# Altium PCB NanoEEG_v3.PcbDoc (part 2 of 2)
Units mm, origin at the board's own origin, x right, y up, seen from the top; angles counter-clockwise.
Board outline 66 x 52 mm, 4 copper layers (Top Layer, Gound Plane 1, Power Plane 1, Bottom Layer), stack 1.87 mm thick; 84 components, 86 nets, 411 pads, 232 vias.
Unrouted connection lines stored in the file: 20.
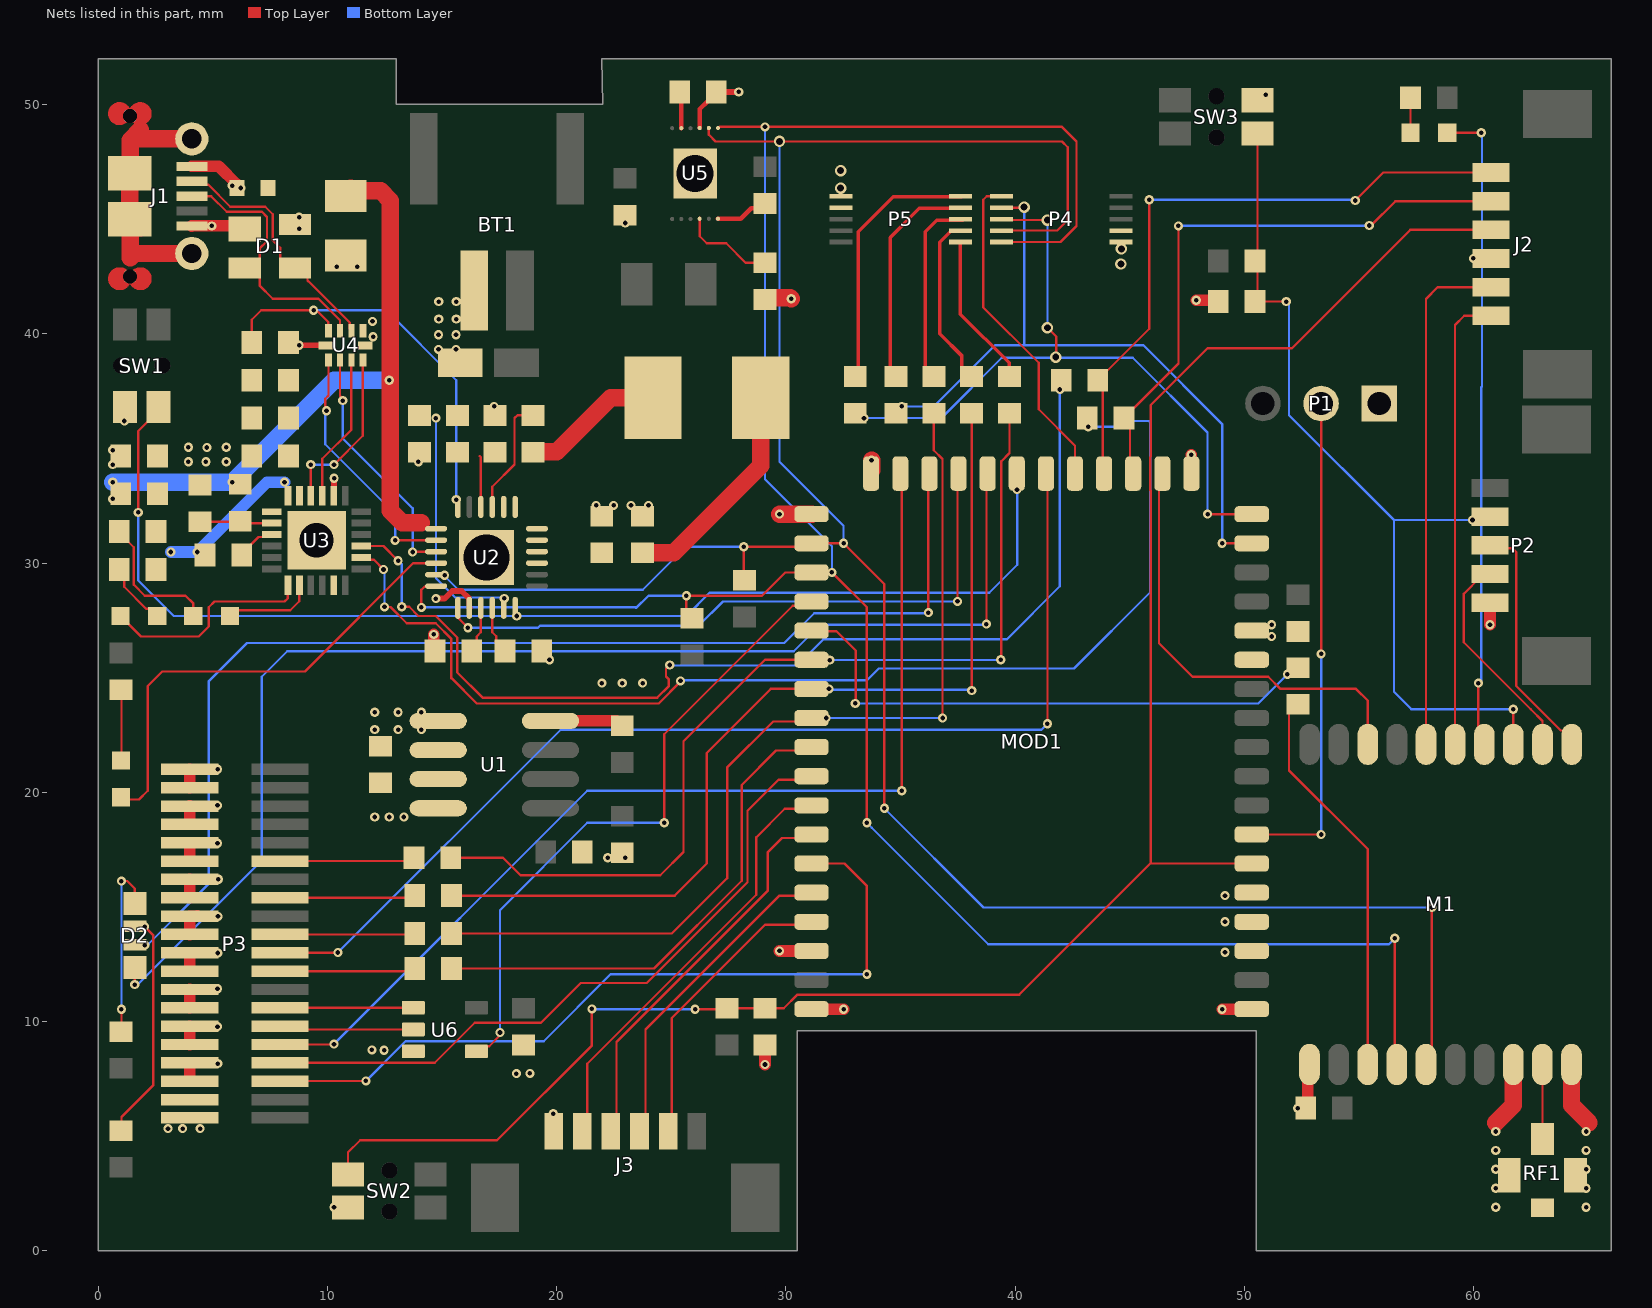
[diagram p4: the nets of this part, all layers, seen from the top]

## Via types
v1: diameter 0.4, hole 0.2, Top Layer to Bottom Layer, 215 vias
v2: diameter 0.5, hole 0.3, Top Layer to Bottom Layer, 11 vias
v3: diameter 4, hole 2, Top Layer to Bottom Layer, 3 vias
v4: diameter 2, hole 1.5, Top Layer to Bottom Layer, 1 vias
v5: diameter 1.2, hole 0.9, Top Layer to Bottom Layer, 1 vias
v6: diameter 1.5, hole 1.3, Top Layer to Bottom Layer, 1 vias

## Nets (pads, with @x,y where several pads share a name; then routed paths per layer and width w, separated by ;. In a path a pad name is that pad's centre, name@x,y a point inside that pad or via, vN(x,y) a via of type N, cw(c..) or ccw(c..) an arc to the next point about the centre after c; other vN are vias at no path point) (continued)
BQ_CHARGE_STAT: LED4.1 U2.4 | length 20.7
  Top Layer w0.1: LED4.1@1,19.79 1.105,19.685 1.778,19.685 2.159,20.066 2.159,24.638 2.794,25.273 9.017,25.273 13.74,29.996 U2.4@14.74,29.996
BQ_D+: U2.2 U4.1 | length 11
  Top Layer w0.1: v1(9.959,36.643) 9.907,36.695 9.907,37.166 10.045,37.304 U4.1@10.045,38.86 ; v1(12.954,30.988) 14.732,30.988 U2.2@14.74,30.996
  Bottom Layer w0.1: v1(9.959,36.643) 9.906,36.591 9.906,35.179 12.954,32.131 v1(12.954,30.988)
BQ_D-: U2.3 U4.2 | length 10.7
  Top Layer w0.1: U4.2@10.545,38.86 10.545,37.288 10.668,37.165 v1(10.668,37.084) ; v1(13.716,30.48) 13.724,30.488 14.732,30.488 U2.3@14.74,30.496
  Bottom Layer w0.1: v1(10.668,37.084) 10.668,35.433 13.716,32.385 v1(13.716,30.48)
BQ_DSEL: R14.2 U2.24 U4.9 | length 17.8
  Top Layer w0.1: R14.2@6.701,39.624 6.701,40.61 7.112,41.021 9.525,41.021 10.033,40.513 10.033,40.147 U4.9@10.045,40.134
  Bottom Layer w0.1: v1(9.398,41.021) 12.573,41.021 15.621,37.973 v1(15.621,32.766)
BQ_INT: MOD1.27 U2.7 | length 28.3
  Top Layer w0.102: U2.7@15.69,28.046 15.69,27.646 15.748,27.588 15.748,27.559 v1(16.129,27.178) ; v1(37.48,28.324) 37.48,33.734 MOD1.27@37.525,33.779
  Bottom Layer w0.102: v1(16.129,27.178) 16.132,27.181 19.184,27.181 19.268,27.266 26.189,27.266 27.248,28.324 v1(37.48,28.324)
BQ_nCE: R18.1 U2.9 | length 2
  Top Layer w0.102: R18.1@16.294,26.162 16.51,26.378 16.51,26.797 16.69,26.977 U2.9@16.69,28.046
BQ_nQON: MOD1.25 SW1.1' U2.12 | length 51
  Top Layer w0.102: v1(1.75,32.21) 1.75,35.753 2.63,36.633 SW1.1'@2.63,36.808
  Bottom Layer w0.102: v1(1.75,32.21) 1.75,29.238 3.299,27.689 v1@18.253,27.689 ; v1(18.254,27.69) 25.658,27.69 26.67,28.702 38.862,28.702 40.087,29.927 v1@40.087,33.092
  other v1: 40.075,33.201
BQ_REGN: C12.1 R15.1 U2.22 | length 2.2
  Top Layer w0.1: 16.637,34.671 16.69,34.618 U2.22@16.69,32.446
CC1310_nRESET: C21.2 M1.3 P2.4 R24.1 SW3.1 | length 37.8
  Top Layer w0.1: SW3.1@50.568,48.353 50.568,43.18 50.568,41.513 C21.2@50.457,41.402 50.584,41.402 v1(51.816,41.402) ; v1(61.722,23.622) 61.722,22.092 M1.3@61.726,22.088
  Bottom Layer w0.1: v1@51.943,41.402 51.943,36.449 56.515,31.877 ; v1(59.944,31.877) 56.515,31.877 ; v1(61.722,23.622) 57.277,23.622 56.515,24.384 56.515,31.877
CC1310_Sync_PWM: MOD1.35 R34.2 | length 24
  Top Layer w0.1: MOD1.35@31.115,27.051 31.147,27.019 32.204,27.019 33.04,26.183 33.04,23.896 v1(33.02,23.876)
  Bottom Layer w0.1: v1(33.02,23.876) 50.594,23.876 v1(51.869,25.151)
CC1310_TCKC: M1.2 P2.2 | length 9.4
  Top Layer w0.1: P2.2@60.706,29.397 60.306,29.397 59.563,28.654 59.563,26.543 62.484,23.622 62.996,23.11 M1.2@62.996,22.088
CC1310_TMSC: M1.1 P2.3 | length 10.7
  Top Layer w0.1: P2.3@60.706,30.647 61.682,30.647 61.849,30.48 61.849,24.638 62.611,23.876 63.796,22.691 63.901,22.691 64.27,22.322 M1.1@64.27,22.088
CC1310_UART_RX: J2.1 M1.5 | length 20
  Top Layer w0.1: M1.5@59.186,22.088 59.182,22.092 59.182,40.386 59.579,40.783 J2.1@60.746,40.783
CC1310_UART_TX: J2.2 M1.6 | length 22.5
  Top Layer w0.1: M1.6@57.916,22.088 57.912,22.092 57.912,41.519 58.426,42.033 J2.2@60.746,42.033
CC1310_WAKEUP: M1.8 MOD1.20 | length 19.3
  Top Layer w0.1: MOD1.20@46.273,33.75 46.273,26.498 47.733,25.038 51.036,25.038 51.563,24.511 54.864,24.511 55.372,24.003 55.372,22.092 M1.8@55.376,22.088
CC3235_JTAG_TCK: J3.4 MOD1.44 | length 14
  Top Layer w0.1: J3.4@23.876,5.177 23.876,9.652 29.718,15.494 MOD1.44@30.949,15.494
CC3235_JTAG_TDI: J3.2 MOD1.41 | length 18.7
  Top Layer w0.1: J3.2@21.336,5.123 21.336,8.163 28.702,15.529 28.702,18.034 29.948,19.28 MOD1.41@30.973,19.28
CC3235_JTAG_TDO: J3.3 MOD1.42 | length 16.9
  Top Layer w0.1: J3.3@22.606,5.211 22.606,9.112 29.21,15.716 29.21,17.399 29.821,18.01 MOD1.42@30.973,18.01
CC3235_JTAG_TMS: J3.5 MOD1.45 | length 12.6
  Top Layer w0.1: J3.5@25.019,5.15 25.019,10.16 29.083,14.224 MOD1.45@30.949,14.224
CC3235_MODE02: MOD1.7 P1.2 | length 22
  Top Layer w0.1: MOD1.7@50.315,18.161 50.491,18.337 50.668,18.161 v1(53.34,18.161) ; v1(53.34,26.035) P1.2@53.34,36.957
  Bottom Layer w0.1: v1(53.34,18.161) v1(53.34,26.035)
CC3235_nRST: C20.2 J2.4 MOD1.6 R20.1 SW2.1 | length 84.6
  Top Layer w0.1: SW2.1@10.9,3.336 10.9,4.296 11.43,4.826 17.399,4.826 21.534,8.961 v1(21.534,10.555) ; v1(26.035,10.541) 27.394,10.541 R20.1@27.432,10.579 C20.2@29.083,10.579 29.905,10.579 30.502,11.176 40.173,11.176 45.908,16.912 ; MOD1.6@50.315,16.891 45.929,16.891 45.908,16.912 ; J2.4@60.746,44.533 57.233,44.533 52.07,39.37 48.387,39.37 45.908,36.891 45.908,34.642 45.888,34.622 45.888,33.18 45.908,33.16 45.908,16.912
  Bottom Layer w0.1: v1(21.534,10.555) 21.549,10.541 v1(26.035,10.541)
CC3235_UART_RX: J2.6 MOD1.22 R23.1 | length 28.3
  Top Layer w0.1: R23.1@43.599,37.973 45.847,40.221 v1(45.847,45.847) ; R23.1@43.815,37.973 43.815,33.961 MOD1.22@43.875,33.901 ; v1@54.733,45.847 54.768,45.812 v1(54.829,45.812) 56.05,47.033 J2.6@60.746,47.033
  Bottom Layer w0.1: v1(45.847,45.847) v1@54.733,45.847
CC3235_UART_TX: J2.5 MOD1.21 R22.1 | length 25.6
  Top Layer w0.1: R22.1@44.361,36.322 R22.1@44.577,36.538 ; R22.1@44.958,36.538 47.117,38.697 v1(47.117,44.704) ; MOD1.21@45.003,34.155 R22.1@45.003,36.322 ; v1(55.438,44.723) 55.518,44.723 56.578,45.783 J2.5@60.746,45.783
  Bottom Layer w0.1: v1(47.117,44.704) 55.419,44.704 v1(55.438,44.723)
CoP_LED1: LED3.1 M1.4 | length 28.4
  Top Layer w0.1: LED3.1@58.839,48.768 v1(60.325,48.768) ; v1(60.198,24.765) 60.198,22.346 M1.4@60.456,22.088
  Bottom Layer w0.1: v1(60.198,24.765) 60.325,24.892 60.325,37.672 60.356,37.702 60.356,48.26 60.356,48.737 v1(60.325,48.768)
CP2102_RXD: R22.2 U3.20 | length 51.3
  Top Layer w0.1: U3.20@11.475,30.238 11.575,30.138 12.026,30.138 v1(12.446,29.718) ; v1(12.489,28.086) 12.748,28.086 13.461,27.372 14.724,27.372 15.406,26.69 15.406,24.98 16.51,23.876 24.447,23.876 25.4,24.829 v1(25.4,24.86)
  Bottom Layer w0.1: v1(12.446,29.718) 12.489,29.675 v1(12.489,28.086) ; v1(25.4,24.86) 25.428,24.888 33.531,24.888 34.043,25.4 42.559,25.4 45.889,28.73 45.889,36.134 45.83,36.192 44.65,36.192 44.398,35.941 v1(43.18,35.941)
CP2102_RXT: LED1.1 U3.13 | length 9.4
  Top Layer w0.1: LED1.1@0.978,27.686 1.328,27.336 1.867,26.797 4.386,26.797 4.826,27.237 4.826,28.067 5.08,28.321 8.128,28.321 8.275,28.468 U3.13@8.275,29.038
CP2102_SUSPEND: U3.17
CP2102_TXD: R23.2 U3.21 | length 46.4
  Top Layer w0.1: U3.21@11.475,30.738 12.442,30.738 v1(13.081,30.099) ; v1(13.239,28.092) 13.564,28.092 13.966,27.69 14.728,27.69 15.667,26.751 15.667,25.227 16.764,24.13 24.38,24.13 24.892,24.642 24.892,24.919 24.766,25.045 24.766,25.404 24.913,25.551 v1(24.93,25.551)
  Bottom Layer w0.1: v1(13.081,30.099) 13.239,29.941 v1(13.239,28.092) ; v1(24.93,25.551) 24.954,25.527 30.48,25.527 31.623,26.67 39.624,26.67 41.944,28.99 v1(41.944,37.568)
CP2102_TXT: LED2.1 U3.14 | length 4
  Top Layer w0.102: LED2.1@5.753,27.686 6.007,27.94 8.382,27.94 8.775,28.333 U3.14@8.775,29.038
CP2102_VDD: C13.2 C16.2 C17.2 R3.2 R4.2 R12.2 R14.1 U3.5 U3.6 U4.10 | length 7.9
  Top Layer w0.254: R14.1@8.428,39.497 U4.10@9.935,39.497
  Top Layer w0.508: R14.1@8.301,39.624 R14.1@8.428,39.497
  Bottom Layer w0.508: v1(3.175,30.48) v1(4.318,30.48) 7.366,33.528 v1(8.128,33.528)
  other v1: 8.763,39.497
CP_D+: U3.3 U4.3 | length 6.4
  Top Layer w0.1: U3.3@9.775,32.938 9.779,32.942 9.779,34.544 11.045,35.81 U4.3@11.045,38.86
CP_D-: U3.4 U4.4 | length 7.5
  Top Layer w0.1: v1(9.271,34.29) 9.271,33.061 9.335,32.998 U3.4@9.275,32.938 ; v1(10.287,34.29) 11.545,35.548 U4.4@11.545,38.86
  Bottom Layer w0.1: v1(9.271,34.29) v1(10.287,34.29)
D+: D1.2 J1.3 U4.8 | length 11.9
  Top Layer w0.1: J1.3@4.085,46 4.927,46 5.611,45.316 7.142,45.316 7.366,45.092 7.366,44.038 7.043,43.715 7.043,43.265 D1.2@6.643,42.865 ; D1.2@6.393,42.865 D1.2@6.643,42.865 ; U4.8@10.545,40.134 10.545,40.592 9.608,41.529 7.62,41.529 7.043,42.106 7.043,42.465 D1.2@6.643,42.865
D-: D1.3 J1.2 U4.7 | length 10.9
  Top Layer w0.1: J1.2@4.085,46.65 4.235,46.5 4.808,46.5 5.765,45.543 7.289,45.543 7.62,45.212 7.62,44.069 7.943,43.746 7.943,43.265 8.343,42.865 8.734,42.865 9.134,42.465 9.134,42.324 9.258,42.2 10.972,40.486 10.972,40.208 U4.7@11.045,40.134
GND: BT1.2 C1.1 C2.2 C3.1 C4.1 C6.1 C7.1 C8.1 C9.1 C10.1 C11.1 C12.2 C13.1 C14.2 C15.1 C16.1 C17.1 C18.1 C19.1 C20.1 C21.1 D1.1 J1.5 J1.6 J1.7 J1.8 J1.9 J1.10 J1.11 J2.3 J3.1 M1.11 M1.18 M1.20 MOD1.1 MOD1.3 MOD1.4 MOD1.5 MOD1.13 MOD1.14 MOD1.19 MOD1.30 MOD1.31 MOD1.46 MOD1.48 P1.1 P2.1 P3.5 P3.7 P3.9 P3.11 P3.13 P3.15 P3.17 P3.19 P3.21 P3.23 P3.25 P3.27 P3.29 P3.31 P3.33 P3.35 P3.37 P3.39 P4.4 P4.5 P5.4 P5.5 R10.1 R13.2 R17.2 R18.2 R21.2 RF1.2 RF1.3 RF1.4 SW1.2' SW2.2 SW3.2 U1.1 U1.2 U2.8 U2.17 U2.18 U2.25 U3.2 U3.25 U4.5 U4.6 U5.3 U5.13 U6.3 | length 46.6
  Top Layer w0.2: U5.3@26.235,48.975 26.235,49.801 26.58,50.146 26.612,50.146 C15.1@26.962,50.496
  Top Layer w0.254: U3.2@10.275,32.938 10.282,32.945 10.282,33.687 v1(10.289,33.694) ; v1(14.732,28.448) 15.113,28.448 15.448,28.783 15.852,28.783 16.183,28.451 16.183,28.053 U2.8@16.19,28.046 ; C15.1@26.962,50.496 27.012,50.546 v1(27.94,50.546)
  Top Layer w0.508: P3.5@4,7.4 P3.7@4,8.2 ; P3.9@4,9 P3.11@4,9.8 ; P3.13@4,10.6 P3.15@4,11.4 ; P3.17@4,12.2 P3.19@4,13 ; P3.21@4,13.8 P3.23@4,14.6 4.314,14.6 P3.23@4.318,14.604 ; P3.25@4,15.4 P3.27@4,16.2 ; P3.29@4,17 P3.31@4,17.8 ; P3.33@4,18.6 P3.35@4,19.4 ; P3.37@4,20.2 P3.39@4,21 ; J1.5@4.085,44.7 4.089,44.704 v1(4.953,44.704) 6.254,44.704 D1.1@6.393,44.565 ; v1(14.639,26.885) 14.639,26.217 R18.2@14.694,26.162 ; R10.1@19.342,26.162 19.304,26.162 R10.1@19.431,26.289 ; v1(29.083,8.128) C20.1@29.083,8.979 C20.1@29.121,9.017 ; v1(29.718,13.081) MOD1.46@31.115,13.081 ; MOD1.48@31.115,10.541 v1(32.512,10.541) ; v1(47.675,34.72) 47.675,33.911 MOD1.19@47.685,33.901 ; v1(47.894,41.463) 48.796,41.463 C21.1@48.857,41.402 ; v1(49.022,10.541) MOD1.1@50.315,10.541 ; C6.1@52.667,6.223 52.757,6.313 52.757,8.053 M1.11@52.832,8.128 ; v1(60.706,27.305) P2.1@60.706,28.274
  Top Layer w0.762: J1.9@1.385,47 J1.9@1.397,47.012 ; J1.10@1.458,45 J1.10@1.827,44.631 ; 1.843,48.5 J1.6@4.085,48.5 J1.6@3.953,48.632 ; 1.843,48.895 1.397,48.449 J1.9@1.397,47.012 ; J1.7@4.085,43.5 1.59,43.5 1.397,43.307 1.397,44.988 J1.10@1.385,45 1.385,46.988 1.397,47 J1.9@1.397,47.012 ; R21.2@29.083,41.491 29.152,41.56 30.195,41.56 v1(30.226,41.529) ; v1(29.718,32.131) MOD1.31@31.115,32.131 ; MOD1.30@33.731,34.044 v1(33.731,34.484) ; 60.96,5.588 61.722,6.35 M1.18@61.722,8.128 ; M1.20@64.26,8.128 64.26,6.352 65.024,5.588
  other v1: 10.287,1.905 60.96,1.905 64.897,1.905 60.96,2.73 64.897,2.73 60.96,3.556 64.897,3.556 60.96,4.381 64.897,4.381 60.96,5.207 64.897,5.207 19.852,5.982 52.324,6.223 18.243,7.731 18.832,7.739 5.214,8.169 11.938,8.763 12.472,8.751 5.207,9.779 5.207,11.43 5.221,12.992 49.149,13.025 49.149,14.351 5.227,14.585 49.149,15.494 5.244,16.205 22.225,17.145 22.987,17.145 5.207,17.78 5.207,19.431 5.211,21.006 12.065,22.733 13.081,22.733 14.097,22.733 12.065,23.495 13.081,23.495 14.097,23.495 19.685,25.781 51.181,26.797 51.181,27.305 21.717,32.512 22.479,32.512 23.241,32.512 24.003,32.512 3.937,34.417 4.699,34.417 5.588,34.417 13.97,34.417 4.743,35.038 3.937,35.052 5.588,35.052 1.143,36.195 17.272,36.83 14.846,39.318 15.608,39.318 11.993,39.87 14.846,39.953 15.608,39.953 11.966,40.536 14.859,40.64 15.621,40.64 14.859,41.402 15.621,41.402 10.414,42.926 11.303,42.926 59.979,43.284 22.987,44.831 50.927,50.419
  other v2: 44.606,43.043 44.628,43.703 32.385,46.355 32.385,47.117
  other v4: 9.525,30.988
I2C_SCL_B: M1.15 MOD1.32 P4.9 R6.2 U2.5 U5.2 | length 106.3
  Top Layer w0.1: U2.5@14.74,29.496 14.759,29.515 14.81,29.464 v1(15.113,29.464) ; U5.2@26.635,48.975 26.635,48.684 26.931,48.388 v2(29.717,48.388) 29.718,48.387 42.037,48.387 42.291,48.133 42.291,44.958 41.833,44.5 P4.9@39.395,44.5 ; R6.2@28.194,29.248 28.067,29.375 28.155,29.463 v1(28.155,30.712) 30.966,30.712 MOD1.32@31.115,30.861 v1(32.512,30.861) 34.29,29.083 v1(34.29,19.304) ; MOD1.32@30.973,30.993 MOD1.32@31.1,31.12 ; M1.15@58.162,8.378 v1(58.162,14.976)
  Bottom Layer w0.1: v1(15.113,29.464) 15.113,29.423 15.703,28.833 23.753,28.833 25.632,30.712 v1(28.155,30.712) ; v2(29.717,48.388) 29.717,34.418 32.512,31.623 v1(32.512,30.861) ; v1@34.287,19.307 38.618,14.976 v1(58.162,14.976)
I2C_SDA_B: M1.14 MOD1.33 P4.10 R2.2 U2.6 U5.1 | length 107.4
  Top Layer w0.1: v1(14.097,28.067) 14.097,28.829 14.237,28.969 14.713,28.969 U2.6@14.74,28.996 ; R2.2@25.908,27.597 25.654,27.851 v1(25.654,28.575) 28.956,28.575 29.972,29.591 MOD1.33@31.115,29.591 v1(32.004,29.591) 33.528,28.067 v1(33.528,18.669) ; U5.1@27.035,48.975 27.057,48.975 27.103,49.022 v1(29.083,49.022) 42.037,49.022 42.672,48.387 42.672,44.704 41.968,44 P4.10@39.395,44 ; v1(56.553,13.635) 56.553,8.217 M1.14@56.642,8.128
  Bottom Layer w0.1: v1(14.097,28.067) 23.431,28.067 23.463,28.035 24.003,28.575 v1(25.654,28.575) ; v1(29.083,49.022) 29.083,33.655 32.004,30.734 v1(32.004,29.591) ; v1(33.528,18.669) 33.74,18.457 38.82,13.377 56.299,13.377 56.553,13.631 v1(56.553,13.635)
INT_1: MOD1.23 P4.6 | length 14.5
  Top Layer w0.1: P4.6@39.395,46 38.761,46 38.608,45.847 38.608,41.148 41.021,38.735 41.021,36.703 42.605,35.119 MOD1.23@42.605,33.901
INT_2: MOD1.17 P4.7 R32.2 | length 30.2
  Top Layer w0.1: P4.7@39.395,45.5 40.364,45.5 v2(40.386,45.522) ; v1(49.022,30.861) 49.807,30.861 50.061,31.115 MOD1.17@50.315,30.861
  Bottom Layer w0.1: v1(35.052,36.83) 36.449,36.83 39.116,39.497 45.593,39.497 49.022,36.068 v1(49.022,30.861) ; 40.386,39.497 v2(40.386,45.522)
INT_3: MOD1.18 P4.8 R33.2 | length 31.2
  Top Layer w0.1: P4.8@39.395,45 39.437,44.958 v2(41.402,44.958) ; v2(41.402,40.259) 41.783,39.878 v2@41.783,38.979 ; v1(48.387,32.131) 50.061,32.131 50.188,32.258 MOD1.18@50.315,32.131
  Bottom Layer w0.1: v1(33.401,36.322) 36.779,36.322 39.408,38.951 45.123,38.951 48.387,35.687 v1(48.387,32.131) ; v2(41.402,40.259) v2(41.402,44.958)
  other v2: 41.767,38.979
Mod1_nDRDY: P3.12 U6.2 | length 5.9
  Top Layer w0.1: P3.12@7.93,9.8 8.078,9.652 U6.2@13.746,9.652
Mod2_nCS: MOD1.24 P3.20 | length 48.6
  Top Layer w0.1: P3.20@7.93,13 10.441,13 v1(10.455,13.014) ; MOD1.24@41.335,33.901 41.417,33.819 41.402,33.804 v1(41.402,22.987)
  Bottom Layer w0.1: v1(10.455,13.014) 20.174,22.733 41.148,22.733 v1(41.402,22.987)
Mod2_nDRDY: P3.14 U6.1 | length 5.8
  Top Layer w0.1: P3.14@7.93,10.6 7.932,10.602 U6.1@13.746,10.602
Mod_MISO: P3.26 R26.2 | length 5.9
  Top Layer w0.1: P3.26@7.93,15.4 13.719,15.4 R26.2@13.813,15.494
Mod_MOSI: P3.22 R27.2 | length 5.9
  Top Layer w0.1: P3.22@7.93,13.8 13.77,13.8 R27.2@13.813,13.843
Mod_nCS: P3.18 R28.2 | length 5.9
  Top Layer w0.1: P3.18@7.93,12.2 13.694,12.2 R28.2@13.813,12.319
Mod_nDRDY: MOD1.34 U6.4 | length 28.2
  Top Layer w0.1: U6.4@16.496,8.702 16.721,8.927 17.054,8.927 17.526,9.399 v1(17.526,9.525) ; v1(24.689,18.673) 24.689,22.53 30.293,28.134 30.928,28.134 MOD1.34@31.115,28.321
  Bottom Layer w0.1: v1(17.526,9.525) 17.526,14.859 21.336,18.669 v1@24.638,18.669
Mod_nPWDN: MOD1.40 P3.8 | length 30
  Top Layer w0.1: P3.8@7.93,8.2 14.677,8.2 16.429,9.952 19.313,9.952 21.045,11.684 23.929,11.684 28.321,16.076 28.321,19.197 29.674,20.55 MOD1.40@30.973,20.55
Mod_nRESET: MOD1.43 P3.6 | length 34.2
  Top Layer w0.1: P3.6@7.93,7.4 7.941,7.411 v1(11.677,7.411) ; MOD1.43@31.115,16.891 32.551,16.891 33.528,15.914 v1(33.528,12.065)
  Bottom Layer w0.1: v1(11.677,7.411) 13.409,9.144 19.431,9.144 22.352,12.065 v1(33.528,12.065)
Mod_SCLK: P3.30 R25.2 | length 5.9
  Top Layer w0.1: P3.30@7.93,17 13.63,17 R25.2@13.775,17.145
Mod_START: MOD1.29 P3.10 | length 45.7
  Top Layer w0.1: P3.10@7.93,9 10.27,9 v1(10.287,9.017) ; MOD1.29@34.985,33.901 34.798,33.714 35.052,33.46 v1(35.052,20.066)
  Bottom Layer w0.1: v1(10.287,9.017) 21.336,20.066 v1(35.052,20.066)
NetC5_1: C5.1 U2.21 | length 5.1
  Top Layer w0.1: U2.21@17.19,32.446 17.19,33.323 18.161,34.294 18.161,36.322 18.288,36.449 18.954,36.449 C5.1@18.968,36.435
NetC5_2: C5.2 L1.1 U2.19 U2.20 | length 6.2
  Top Layer w0.762: C5.2@18.968,34.835 18.985,34.852 19.993,34.852 22.352,37.211 L1.1@24.201,37.211
NetC15_2: C15.2 U5.5 | length 1.6
  Top Layer w0.2: C15.2@25.362,50.546 25.435,50.473 U5.5@25.435,48.965
NetD2_2: D2.2 R8.2 | length 9.6
  Top Layer w0.1: R8.2@1,5.245 1.016,5.261 1.016,5.842 2.409,7.235 2.409,13.76 v1(2.025,14.144)
NetD2_4: D2.4 R7.2 | length 7.9
  Top Layer w0.1: R7.2@1,9.563 1.016,9.579 v1(1.016,10.541) ; v1(1.016,16.129) 1.27,16.129 1.6,15.799 D2.4@1.6,15.158
  Bottom Layer w0.1: v1(1.016,10.541) v1(1.016,16.129)
NetLED1_2: LED1.2 R3.1 | length 2.8
  Top Layer w0.1: R3.1@0.922,29.718 1.137,29.503 1.137,28.962 2.089,28.01 2.254,28.01 LED1.2@2.578,27.686
NetLED2_2: LED2.2 R4.1 | length 6.1
  Top Layer w0.1: R4.1@0.922,31.369 0.922,31.319 1.549,30.692 1.549,29.058 2.032,28.575 3.81,28.575 4.153,28.232 LED2.2@4.153,27.686
NetLED3_2: LED3.2 R5.1 | length 1.5
  Top Layer w0.1: LED3.2@57.239,48.768 R5.1@57.239,50.292
NetLED4_2: LED4.2 R9.1 | length 3.1
  Top Layer w0.1: LED4.2@1,21.39 1.016,21.406 1.016,24.457 R9.1@1,24.473
NetM1_13: M1.13 R34.1 | length 17.3
  Top Layer w0.1: R34.1@52.324,23.838 51.943,23.457 51.943,20.955 55.372,17.526 M1.13@55.372,8.128
NetM1_19: M1.19 RF1.1 | length 3.3
  Top Layer w0.1: RF1.1@62.992,4.877 M1.19@62.992,8.128
NetMOD1_36: MOD1.36 R25.1 R29.2 | length 41.2
  Top Layer w0.1: R25.1@15.375,17.145 17.657,17.145 18.419,16.383 24.511,16.383 25.527,17.399 25.527,22.225 29.083,25.781 MOD1.36@31.115,25.781 ; v1@39.386,25.781 39.386,34.434 39.751,34.799 R29.2@39.751,36.538
  Bottom Layer w0.1: v1(31.907,25.768) 39.357,25.768 v1(39.37,25.781)
NetMOD1_37: MOD1.37 R26.1 R30.2 | length 40.6
  Top Layer w0.1: R26.1@15.413,15.494 25.146,15.494 26.543,16.891 26.543,21.717 29.337,24.511 MOD1.37@31.115,24.511 ; R30.2@38.1,36.538 v1(38.1,24.434) ; v1(38.1,24.434) v1@38.101,24.433
  Bottom Layer w0.1: v1(31.877,24.511) 31.915,24.473 38.062,24.473 v1(38.1,24.434)
NetMOD1_38: MOD1.38 R27.1 R31.2 | length 40.8
  Top Layer w0.1: R27.1@15.413,13.843 25.019,13.843 27.432,16.256 27.432,21.082 29.44,23.09 MOD1.38@30.973,23.09 ; R31.2@36.449,36.538 36.449,34.919 36.83,34.538 v1(36.83,23.241)
  Bottom Layer w0.1: v1(31.75,23.241) v1(36.83,23.241)
NetMOD1_39: MOD1.39 R28.1 | length 21.9
  Top Layer w0.1: R28.1@15.413,12.319 24.243,12.319 28.067,16.143 28.067,20.32 29.567,21.82 MOD1.39@30.973,21.82
NetR10_2: R10.2 U2.10 | length 2.5
  Top Layer w0.1: U2.10@17.19,28.046 17.19,26.981 17.364,26.807 17.364,26.612 17.56,26.416 R10.2@17.695,26.416 ; R10.2@17.342,26.562 R10.2@17.742,26.162
NetR11_2: R11.2 R13.1 U3.8 | length 3.2
  Top Layer w0.102: R13.1@4.445,31.801 6.17,31.801 R11.2@6.198,31.829 6.29,31.738 U3.8@7.575,31.738
NetR12_1: R12.1 U3.9 | length 1.7
  Top Layer w0.1: R12.1@6.261,30.353 6.261,30.403 6.996,31.138 7.475,31.138 U3.9@7.575,31.238
NetR15_2: R15.2 R17.1 U2.11 | length 10.3
  Bottom Layer w0.1: v1(14.732,36.322) 14.732,29.337 15.577,28.492 17.673,28.492 v1(17.709,28.456)
PG_3.3VD: R1.1 U1.8 | length 3.2
  Top Layer w0.508: U1.8@19.73,23.114 22.594,23.114 22.81,22.898 R1.1@22.86,22.898
PGau_BIN: R21.1 U5.10 | length 4.1
  Top Layer w0.1: U5.10@26.235,45.07 26.235,44.25 26.543,43.942 27.392,43.942 28.243,43.091 R21.1@29.083,43.091
PGau_OUT: R16.2 U5.12 | length 2.3
  Top Layer w0.2: U5.12@27.035,45.015 28.035,45.015 28.486,45.466 28.829,45.466 R16.2@29.083,45.72
SPI_CS_A/G: P5.9 R32.1 | length 9.8
  Top Layer w0.152: R32.1@34.798,38.138 34.544,38.392 34.544,44.196 35.814,45.466 37.092,45.466 37.102,45.476 P5.9@37.67,45.476
SPI_CS_M: P5.10 R33.1 | length 11.5
  Top Layer w0.152: R33.1@33.02,38.138 33.147,38.265 33.147,44.45 34.671,45.974 37.092,45.974 37.094,45.976 P5.10@37.659,45.976
SPI_MISO: P5.7 R30.1 | length 7.6
  Top Layer w0.152: P5.7@37.605,44.5 37.205,44.5 36.703,43.998 36.703,40.005 37.676,39.032 37.676,38.512 38.05,38.138 R30.1@38.1,38.138
SPI_MOSI: P5.8 R31.1 | length 8.3
  Top Layer w0.152: R31.1@36.449,38.138 36.442,38.138 36.068,38.512 36.068,44.45 36.576,44.958 P5.8@37.71,44.958
SPI_SCLK: P5.6 R29.1 | length 6.8
  Top Layer w0.152: P5.6@37.605,44 37.605,40.855 39.733,38.727 39.733,38.156 R29.1@39.751,38.138
StatusLED_1: D2.3 MOD1.26 | length 55.8
  Top Layer w0.1: v1(1.595,11.611) 1.6,11.616 D2.3@1.6,12.358 ; v1(38.742,27.337) 38.742,33.848 MOD1.26@38.795,33.901
  Bottom Layer w0.1: v1(1.595,11.611) 1.652,11.668 1.777,11.668 7.135,17.027 7.135,25.039 8.25,26.154 30.342,26.154 31.494,27.305 v1@38.843,27.305
StatusLED_2: D2.1 MOD1.28 | length 51.5
  Top Layer w0.1: v1(36.21,27.837) 36.21,33.856 MOD1.28@36.255,33.901
  Bottom Layer w0.1: v1(2.032,13.335) 2.089,13.392 2.208,13.392 4.818,16.002 4.818,24.833 6.492,26.508 29.929,26.508 31.234,27.813 v1@36.314,27.813
SYS_PWR: C1.2 C8.2 C9.2 L1.2 P3.1 P3.3 U1.3 U1.4 U2.15 U2.16 | length 9.7
  Top Layer w0.762: C9.2@23.741,30.442 25.108,30.442 28.901,34.235 L1.2@28.901,37.211
  other v1: 3.048,5.334 3.683,5.334 4.445,5.334 12.065,18.923 12.7,18.923 13.335,18.923 21.971,24.765 22.86,24.765 23.749,24.765
VBUS: C2.1 C10.2 C11.2 FB1.1 R11.1 U2.1 U3.7 | length 31.3
  Top Layer w0.762: R11.1@6.198,33.429 R11.1@6.248,33.429 ; C2.1@10.795,46.131 C2.1@11.019,46.355 ; C2.1@11.019,46.228 12.319,46.228 12.737,45.81 12.737,32.286 13.273,31.75 14.097,31.75
  Bottom Layer w0.762: v1(0.635,33.528) v1(5.842,33.528) 10.287,37.973 v1(12.7,37.973)
  other v1: 0.63,32.796 0.635,34.29 0.635,34.925
VBUS_IN: D1.4 FB1.2 J1.1 | length 2.3
  Top Layer w0.508: J1.1@4.085,47.3 5.263,47.3 6.056,46.507 FB1.2@6.056,46.482
  other v1: 8.763,44.577 8.763,45.085 6.223,46.355 5.849,46.462
pads on no net: BT1.0 J1.4 J2.MP1 J2.MP2 J3.MP1 J3.MP2 M1.7 M1.9 M1.10 M1.16 M1.17 MOD1.2 MOD1.8 MOD1.9 MOD1.10 MOD1.11 MOD1.12 MOD1.47 P2.MP1 P2.MP2 P3.16 P3.24 P3.28 P3.32 P3.34 P3.36 P3.38 P3.40 P4.3 P5.1 P5.2 P5.3 SW1. SW1.1 SW1.2 SW2. SW2.1' SW2.2' SW3. SW3.1' SW3.2' U1.7 U2.23 U3.1 U3.10 U3.11 U3.12 U3.15 U3.16 U3.18 U3.19 U3.22 U3.23 U3.24 U5.4 U5.9 U5.11
copper on no net:
  other v3: 54,3 9,49 54,49
  other v5: 5.965,3.3
  other v6: 5.965,23.5

## Polygon pours and split planes (outlines as drawn)
3.3VD on Power Plane 1 "3.3VD_L03_P000" (solid, pour order 0): 63.537,107.987 99.097,107.987 99.097,66.585 63.725,66.585 63.725,57.314 34.327,57.314 34.327,83.857 63.537,83.857
GND on Gound Plane 1 (split plane): 65.49,51.49 65.49,0.51 51.01,0.51 51.01,9.6 51.001,9.7 50.972,9.795 50.924,9.884 50.861,9.961 50.784,10.024 50.695,10.072 50.6,10.101 50.5,10.11 30.5,10.11 30.4,10.101 30.305,10.072 30.216,10.024 30.139,9.961 30.076,9.884 30.028,9.795 29.999,9.7 29.99,9.6 29.99,0.51 0.51,0.51 0.51,51.49 12.49,51.49 12.49,50 12.499,49.9 12.528,49.805 12.576,49.716 12.639,49.639 12.716,49.576 12.805,49.528 12.9,49.499 13,49.49 22,49.49 22.004,49.49 22.007,49.49 22.053,49.495 22.1,49.499 22.103,49.5 22.107,49.501 22.151,49.515 22.195,49.528 22.199,49.53 22.202,49.531 22.243,49.554 22.284,49.576 22.286,49.578 22.29,49.58 22.325,49.61 22.361,49.639 22.363,49.642 22.366,49.644 22.395,49.681 22.424,49.716 22.426,49.72 22.428,49.723 22.45,49.764 22.472,49.805 22.473,49.808 22.474,49.812 22.487,49.856 22.501,49.9 22.501,49.904 22.502,49.908 22.506,49.954 22.51,50 22.51,50.004 22.51,50.007 22.489,51.49 42,51.49

## Keep-outs
Keep-Out Layer:
  lines w0.254: -0.5,0 30.5,0 30.5,9.6 50.5,9.6 50.5,0 66,0 66,52 42,52 28,52 22,52 ; -0.5,52 13,52 13,50 22,50 21.971,52
  lines w0.3: -0.5,0 -0.5,52

## Other copper
Top Layer:
  rectangle net GND: 31.877,45.392 32.894,47.498
  rectangle net GND: 44.069,42.545 45.16,44.632
  rectangle net 3.3VD: 44.069,45.359 45.137,47.752
  rectangle net GND: 14.097,37.973 16.764,43.688
  rectangle net 3.3VD: 21.844,18.415 23.495,21.844
  rectangle net VBUS: 5.715,32.954 7.563,33.909
  rectangle net VBUS: 6.858,32.131 7.575,33.909
  rectangle net GND: 2.159,32.512 5.08,35.433
  rectangle net BATT_Gau_OUT: 21.082,38.1 22.606,43.112
  rectangle net BATT_Gau_OUT: 21.082,41.222 24.13,43.112
  rectangle net BATT_Gau_OUT: 17.272,38.1 22.606,39.37
  rectangle net GND: 60.579,1.27 61.544,5.715
  rectangle net GND: 64.389,1.27 65.405,5.715
  rectangle net GND: 60.833,1.27 65.024,2.286
  rectangle net GND: 48.895,12.7 51.054,16.002
  rectangle net 3.3VD: 49.403,27.94 52.832,29.972
  rectangle net GND: 49.657,26.543 52.832,27.559
  rectangle net GND: 49.403,25.4 51.181,27.559
  rectangle net BATT_IN: 18.161,40.005 20.701,43.688
  rectangle net GND: 11.34,39.328 12.229,40.852
  rectangle net GND: 19.177,30.86 20.32,32.766
  rectangle net GND: 18.034,7.493 19.05,9.398
  rectangle net GND: 11.684,8.382 14.224,9.144
  rectangle net 3.3VD: 16.002,10.16 19.05,11.43
  rectangle net BATT_IN: 25.527,41.148 27.94,43.18
  rectangle net 3.3VD: 6.604,5.334 12.065,6.858
  rectangle net SYS_PWR: 2.667,5.08 5.334,6.858
  rectangle net GND: 20.574,16.797 23.447,18.161
  rectangle net 3.3VD: 18.288,18.796 23.495,21.209
  rectangle net 3.3VD: 18.288,16.764 19.939,21.082
  rectangle net GND: 11.557,21.336 16.256,23.876
  rectangle net SYS_PWR: 11.684,18.415 16.256,20.955
  rectangle net SYS_PWR: 21.336,24.384 24.384,30.353
  region net GND: 24.384,32.766 19.177,32.766 19.177,31.623 24.384,31.623
  rectangle net VBUS: 0.381,32.385 1.397,35.306
  rectangle net NetR15_2: 13.462,36.068 16.129,36.957
  rectangle net BQ_REGN: 15.113,34.29 17.907,35.306
  rectangle net NetC5_2: 18.415,32.385 18.923,35.306
  rectangle net NetC5_2: 17.653,32.385 18.915,33.274
  rectangle net GND: 4.953,34.036 6.985,38.862
  rectangle net VBUS: 6.985,45.72 11.811,46.863
  rectangle net CP2102_VDD: 2.159,29.083 3.429,32.004
  rectangle net VBUS: 13.47,31.369 14.867,32.131
  rectangle net BATT_Gau_OUT: 19.14,28.956 20.963,29.496
  rectangle net SYS_PWR: 19.14,29.845 24.392,30.607
  rectangle net CP2102_VDD: 7.747,32.766 8.89,40.259
Power Plane 1:
  rectangle net BATT_IN: 18.161,41.021 27.94,43.307
Bottom Layer:
  rectangle net SYS_PWR: 2.667,5.08 9.779,6.223
  rectangle net SYS_PWR: 7.747,18.415 13.97,19.939
  rectangle net SYS_PWR: 7.747,5.08 9.779,25.4
  rectangle net SYS_PWR: 9.652,24.384 24.384,25.4
  rectangle net VBUS_IN: 5.334,44.323 9.398,45.466
  rectangle net VBUS_IN: 5.334,44.323 6.604,46.863
  rectangle net BATT_Gau_OUT: 19.812,29.083 21.074,39.497

## Silkscreen, mask and mechanical layers (free items; w line width, h text height)
Top Overlay:
  lines w0.254: 32.5,39 32.5,51 44.5,51 44.5,39 32.5,39
  text "CC3235_RX" at 54.737,46.279 h1
  text "CC3235_TX" at 54.864,44.882 h1
  text "CC3235_RST" at 54.356,43.612 h1
  text "GND" at 57.785,42.428 h1
  text "CC1310_TX" at 54.737,41.072 h1
  text "CC1310_RX" at 54.737,39.802 h1
  text "-" at 16.383,39.748 h2
  text "+" at 20.828,39.596 h1.5
  text "VDD" at 49.912,34.544 h1
  text "SOP2" at 52.197,34.554 h1
  text "GND" at 54.991,34.554 h1
  text "VDD" at 57.532,32.258 h1
  text "CC1310_RST" at 54.229,31.166 h1
  text "CC1310_TMS" at 54.229,29.896 h1
  text "CC1310_TCK" at 54.229,28.753 h1
  text "GND" at 57.404,27.442 h1
  text "GND" at 19.929,6.35 h1 r90
  text "CC3235_TDI" at 21.158,6.35 h1 r90
  text "CC3235_TDO" at 22.449,6.35 h1 r90
  text "CC3235_TCK" at 23.698,6.35 h1 r90
  text "CC3235_TMS" at 24.968,6.35 h1 r90
  text "VDD" at 26.162,6.351 h1 r90
Mechanical 1:
  lines w0.254: 13,50 13,52 0,52 0,0 30.5,0 30.5,9.6 50.5,9.6 50.5,0 66,0 66,52 42,52 28,52 22,52 ; 13.081,50 21.971,50 ; 21.971,52 22,50